# Altium PCB GSv1_PCB.PcbDoc
Units mm, origin at the board's own origin, x right, y up, seen from the top; angles counter-clockwise.
Board outline 82.45 x 81 mm, 2 copper layers (Top Layer, Bottom Layer); 10 components, 12 nets, 88 pads, 26 vias.
Unrouted connection lines stored in the file: 3.
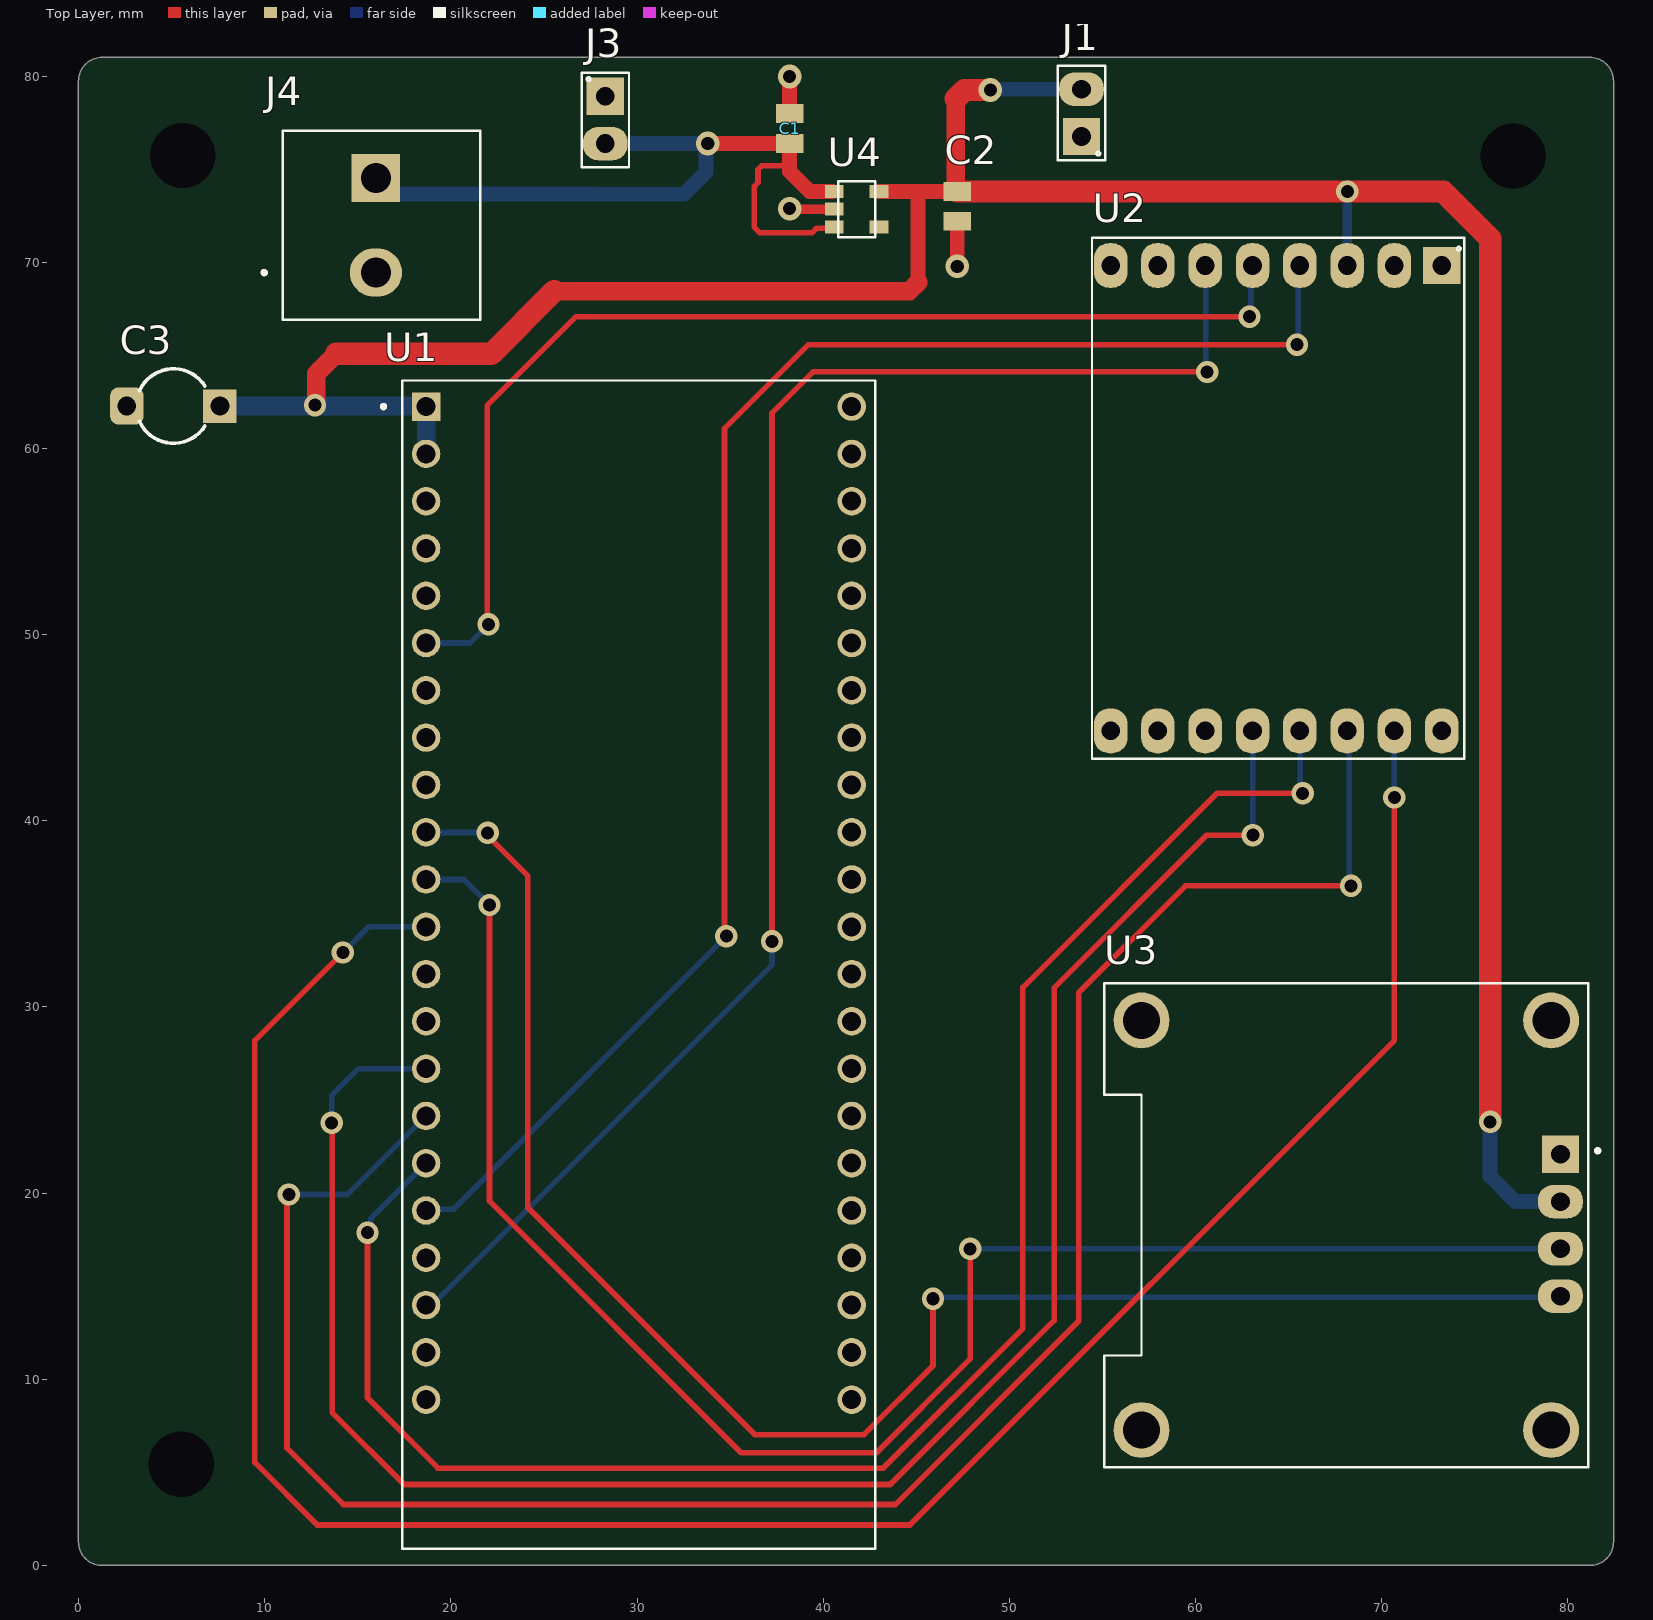
[diagram p0: Top Layer view]
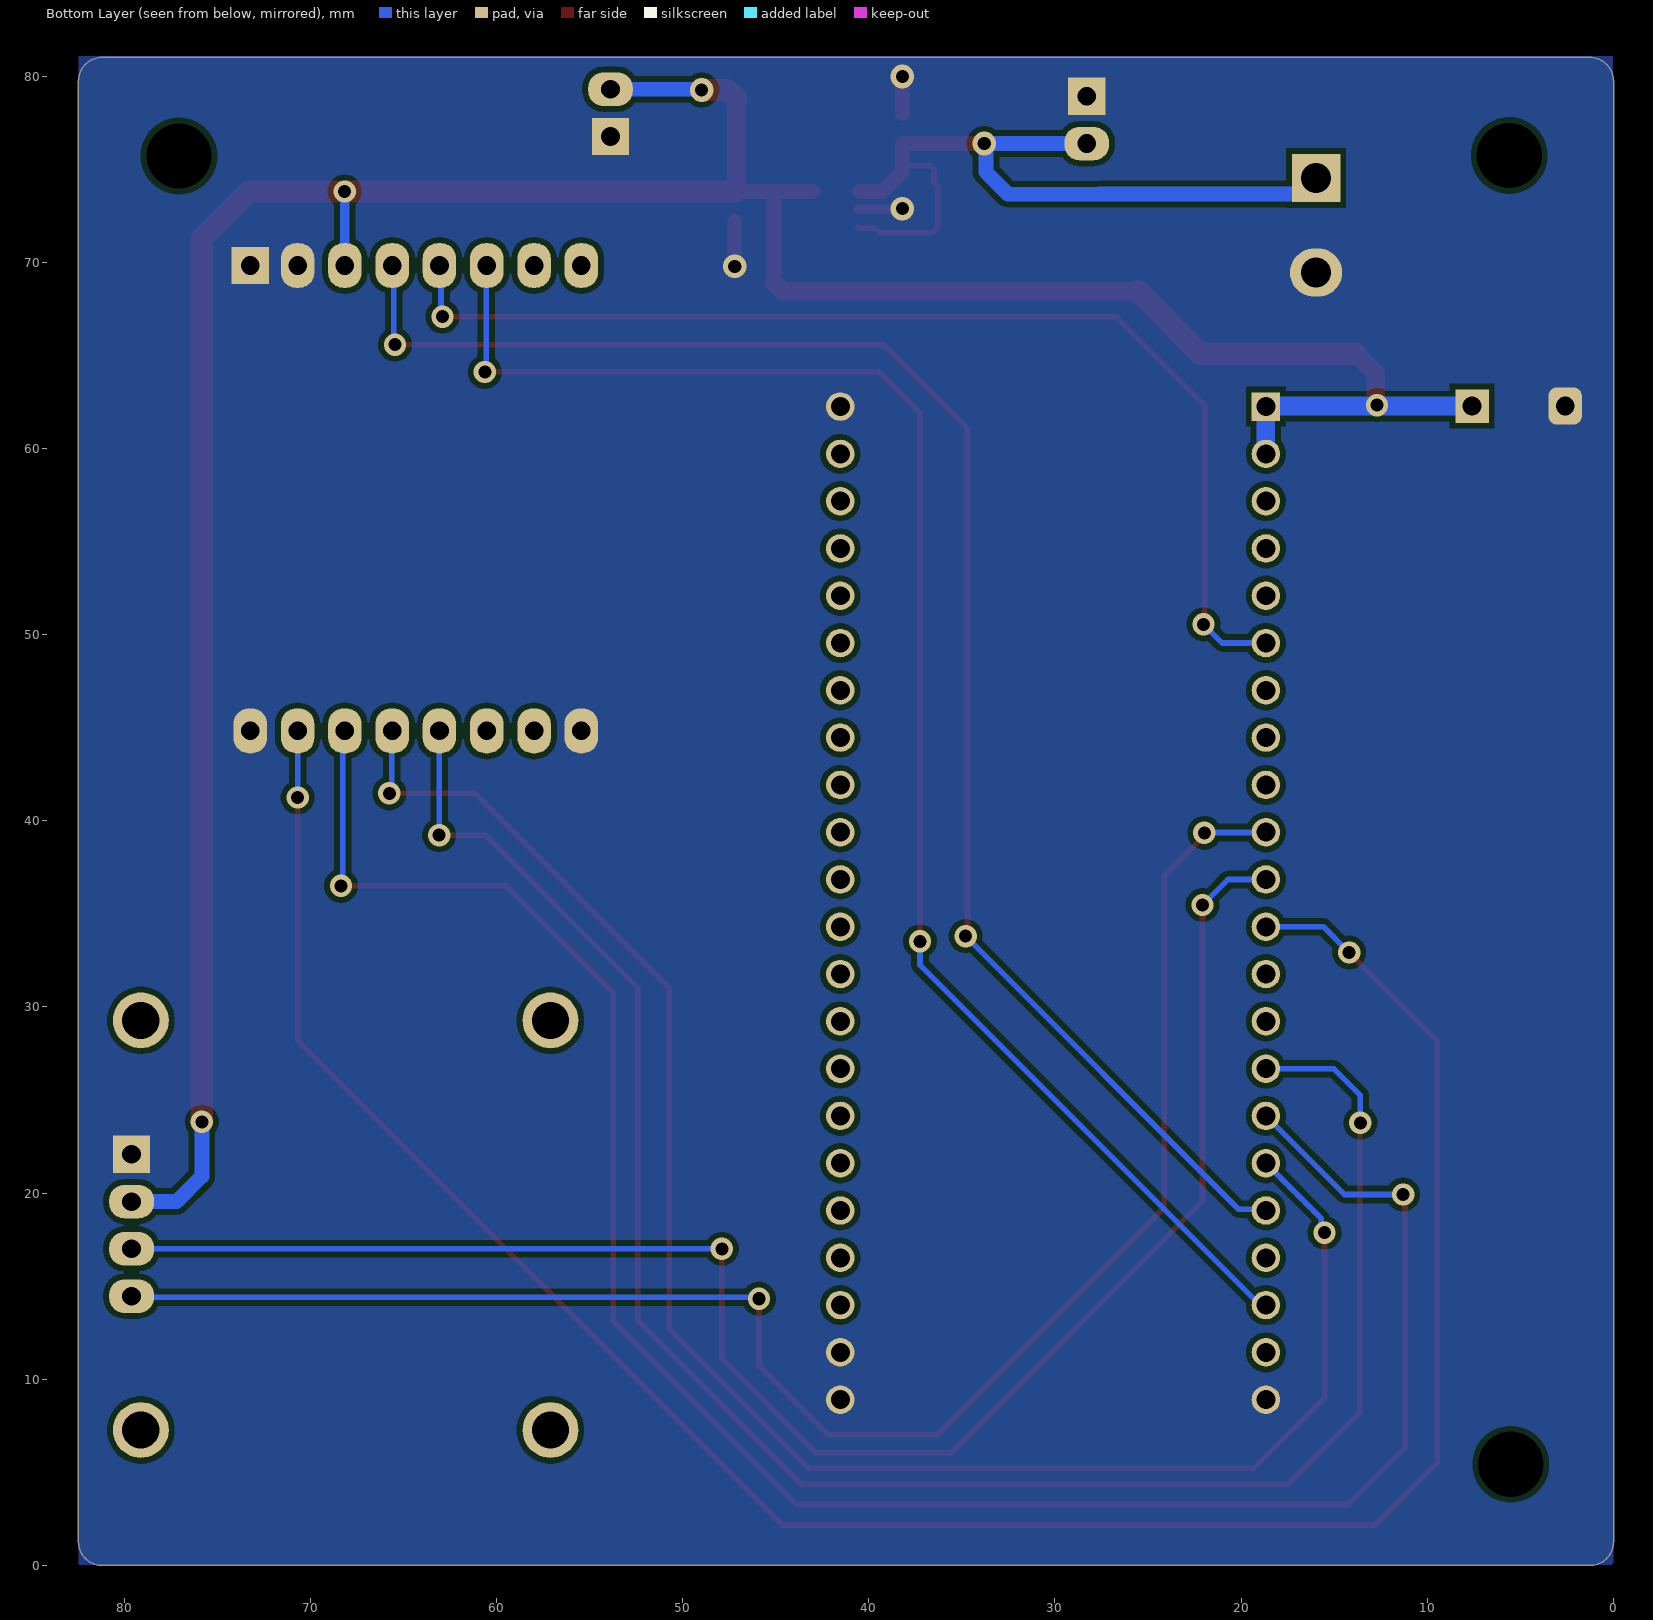
[diagram p1: Bottom Layer view, seen from below]
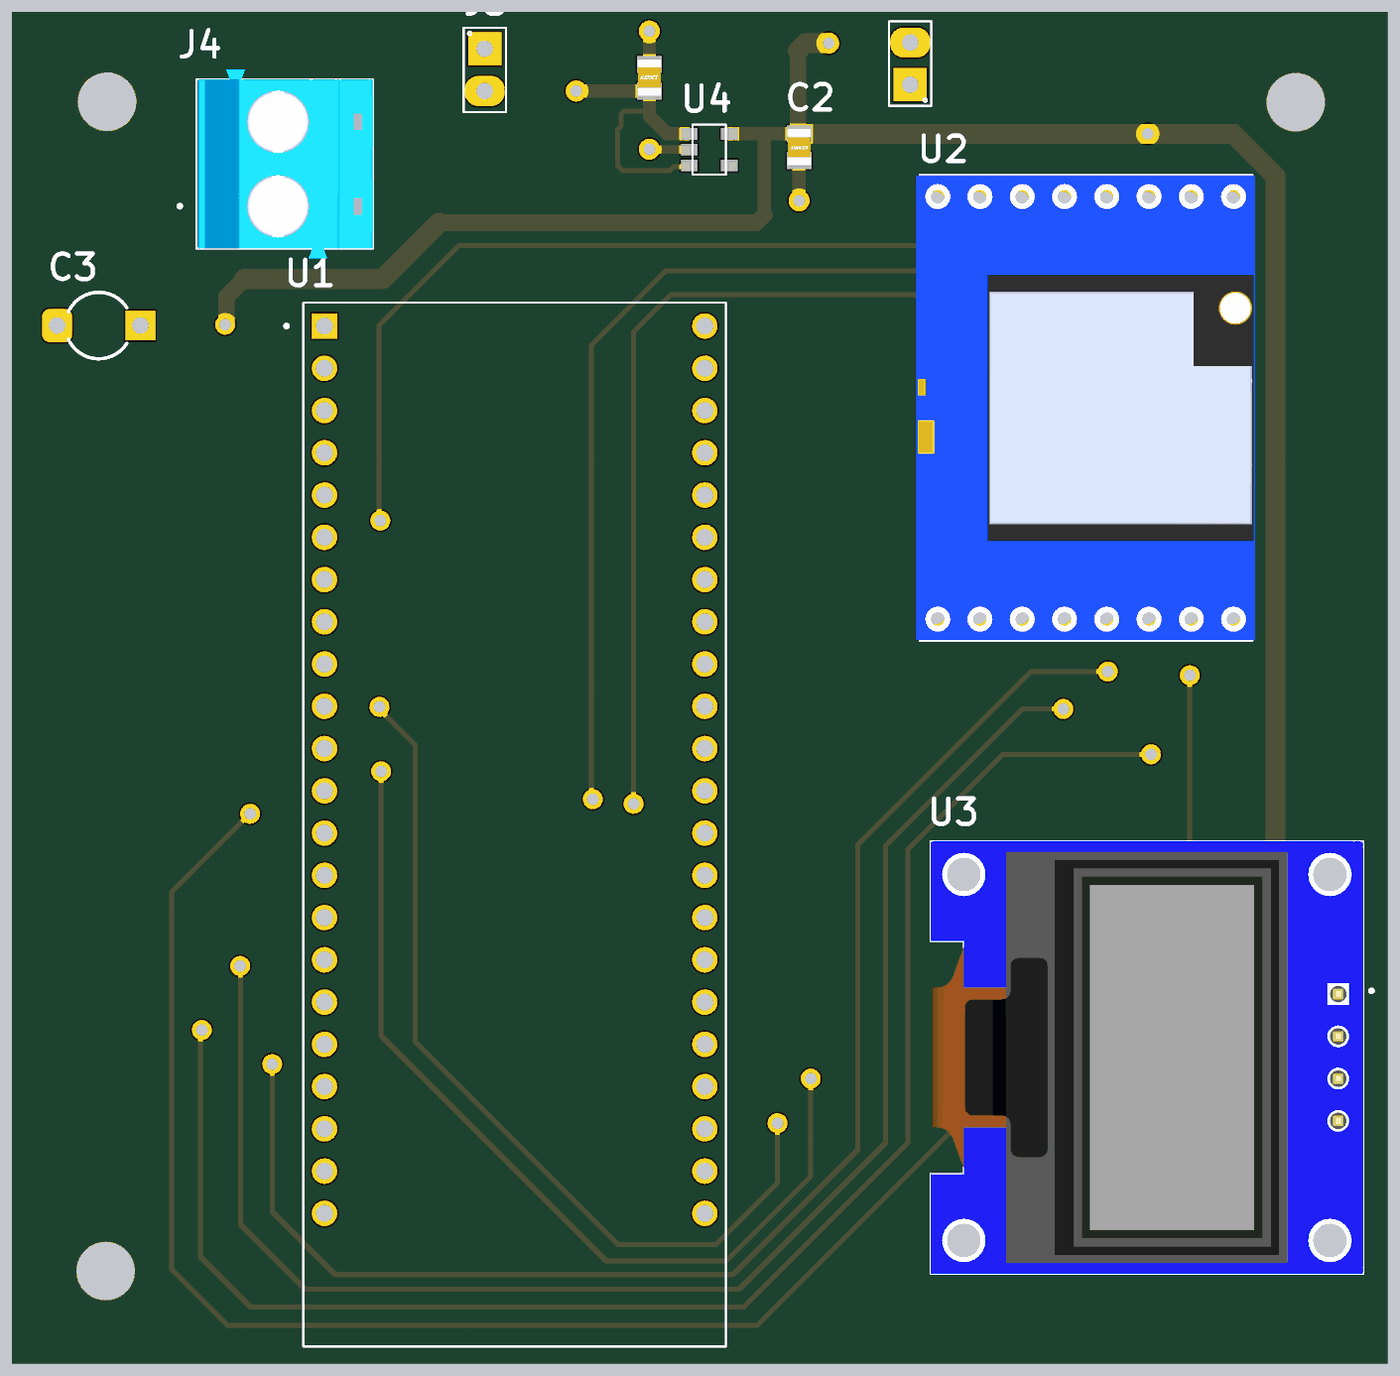
[diagram p2: 3D render of the assembled board from above, using the file's embedded part models]

## Layer stack, top to bottom
Top Solder: solder mask 0.0102, Solder Resist, Dk 3.5
Top Layer: signal copper 0.0356
Dielectric 1: dielectric 0.32, FR-4, Dk 4.8
Bottom Layer: signal copper 0.0356
Bottom Solder: solder mask 0.0102, Solder Resist, Dk 3.5

## Board outline
0,1.27 0,79.73 cw(c1.27,79.73) 1.27,81 81.18,81 cw(c81.18,79.73) 82.45,79.73 82.45,1.27 cw(c81.18,1.27) 81.18,0 1.27,0 cw(c1.27,1.27)

## Design rules (kind name [scope] priority, off if disabled: settings)
Clearance [All] p1: gap=0.3 ignorepadtopadclearanceinfootprint=FALSE
HoleSize [All] p1: absolutevalues=TRUE maxlimit=3.5 minlimit=0.3 maxpercent=80.000 minpercent=20.000
PolygonConnect [All] p1: connectstyle=Direct reliefconductorwidth=0.254 reliefentries=4 polygonreliefangle="90 Angle" airgapwidth=0.254
RoutingVias [All] p1: holewidth=0.711 width=1.27 viastyle="Through Hole" minholewidth=0.711 minwidth=1.27 maxholewidth=0.711 maxwidth=1.27
SolderMaskExpansion [All] p1: expansion=0.102 istentingtop=FALSE
Width [All] p1: maxlimit=1.5 minlimit=0.254 preferedwidth=0.3
29 further rules are at their usual default settings.

## Components (designator, comment, footprint, x,y, rotation, side; value= is the part's Value field where it differs from the comment)
C1 "1uF" 0805 38.2,77.175 r270 top
C2 "2.2uF" 0805 47.2,73 r90 top
C3 "DIP - Electrolytic Capacitor" DIP_Electrolytic_Capacitor 5.1,62.275 r180 top value=100nF
J1 "J - Header 2.54mm 2Pos 1Row" "Header 2.54mm 2Pos 1Row" 53.875,76.75 r90 top
J3 "J - Header 2.54mm 2Pos 1Row" "Header 2.54mm 2Pos 1Row" 28.3,78.915 r270 top
J4 "J - Connector 5.08mm 2Pos" "CONNECTOR 508mm 2POS" 15.975,69.445 r90 top
U1 "ESP32-S3-DEVKITC-1-N8R2" ORIGINAL_ESP32-S3-DEVKITC_1 30.1,32.275 r0 top
U2 "Module - LoRa Ra-02 Ai-Thinker" "MODULE LoRa Ra-02 Ai Thinker_separate rows" 73.22,69.825 r180 top
U3 "Module - OLED Display 096" MODULE_DM-OLED096-636 68.1,18.275 r270 top
U4 "LDO - XC6222B281MR-G" SOT25 41.9,72.8 r270 top

## Footprints (in the part's own frame and the unit in brackets; to place one, negate y for a bottom-side part, rotate by r counter-clockwise, add the part's x,y. Pads: shape width x height; smd on the part's side, far side on the other; paste and mask are expansions set on the pad)
0805 [mm] "0805 case (inch)"
  rect 1.02x1.47 smd: 1(-0.8,0) 2(0.8,0)
  body extent -1.1,-0.73 1.1,0.72, height 0.88
"CONNECTOR 508mm 2POS" [mm]
  oval 2.6x2.8 hole 1.6: 1(0,0)
  rect 2.6x2.6 hole 1.6: 2(5.08,0)
  silkscreen extent -2.54,-5.6 7.62,6.1, body extent -3.14,-5.6 8.22,4.9, height 19.5
DIP_Electrolytic_Capacitor [mm] "DIP Electrolytic Capacitor; 2 Leads; Pin spacing 5mm"
  rect 1.8x1.8 hole 1: 1(-2.5,0)
  rrect50% 1.8x2 hole 1: 2(2.5,0)
  silkscreen extent -1.69,-2 1.82,2
"Header 2.54mm 2Pos 1Row" [mm]
  rect 2x2 hole 1: 1(0,0)
  rrect90% 1.8x2.4 hole 1: 2(2.54,0)
  silkscreen extent -1.27,-1.27 3.81,1.27
"MODULE LoRa Ra-02 Ai Thinker_separate rows" [mm]
  rect 2x2 hole 1: 1(0,0)
  rrect90% 1.8x2.4 hole 1: 2(2.54,0) 3(5.08,0) 4(7.62,0) 5(10.16,0) 6(12.7,0) 7(15.24,0) 8(17.78,0) 9(0,25) 10(2.54,25) 11(5.08,25) 12(7.62,25) 13(10.16,25) 14(12.7,25) 15(15.24,25) 16(17.78,25)
  silkscreen extent -1.22,-1.5 18.78,26.5, body extent -1.4,-1.45 19,26.45, height 4.7
MODULE_DM-OLED096-636 [mm]
  rect 2x2 hole 1: 1(-3.81,11.5)
  rrect90% 1.8x2.4 hole 1: 2(-1.27,11.5) 3(1.27,11.5) 4(3.81,11.5)
  round 3 hole 2: S1(-11,11) S2(11,11) S3(11,-11) S4(-11,-11)
  silkscreen extent -13,-13 13,13.6, body extent -13,-13 13,13, height 5.66
ORIGINAL_ESP32-S3-DEVKITC_1 [mm]
  rect 1.53x1.53 hole 1.02: J1_1(-11.43,29.97)
  round 1.53 hole 1.02: J1_2(-11.43,27.43) J1_3(-11.43,24.89) J1_4(-11.43,22.35) J1_5(-11.43,19.81) J1_6(-11.43,17.27) J1_7(-11.43,14.73) J1_8(-11.43,12.19) J1_9(-11.43,9.65) J1_10(-11.43,7.11) J1_11(-11.43,4.57) J1_12(-11.43,2.03) J1_13(-11.43,-0.51) J1_14(-11.43,-3.05) J1_15(-11.43,-5.59) J1_16(-11.43,-8.13) J1_17(-11.43,-10.67) J1_18(-11.43,-13.21) J1_19(-11.43,-15.75) J1_20(-11.43,-18.29) J1_21(-11.43,-20.83) J1_22(-11.43,-23.37) J3_1(11.43,29.97) J3_2(11.43,27.43) J3_3(11.43,24.89) J3_4(11.43,22.35) J3_5(11.43,19.81) J3_6(11.43,17.27) J3_7(11.43,14.73) J3_8(11.43,12.19) J3_9(11.43,9.65) J3_10(11.43,7.11) J3_11(11.43,4.57) J3_12(11.43,2.03) J3_13(11.43,-0.51) J3_14(11.43,-3.05) J3_15(11.43,-5.59) J3_16(11.43,-8.13) J3_17(11.43,-10.67) J3_18(11.43,-13.21) J3_19(11.43,-15.75) J3_20(11.43,-18.29) J3_21(11.43,-20.83) J3_22(11.43,-23.37)
  silkscreen extent -13.82,-31.37 12.7,31.37
SOT25 [mm]
  rect 0.7x1 smd: P$1(-1,-1.3) P$2(-0.05,-1.3) P$3(0.9,-1.3) P$4(-1,1.1) P$5(0.9,1.1)
  silkscreen extent -1.55,-1.1 1.45,0.9

## Part data
C1 C2: library part "CAP - SMD_0805(inch)", "SMD Ceramic Capacitor"
C3: "Capacitor", PackageDescription="Capacitor; 2 Leads", PackageReference=CAPR5-4X5, Published=23-Sep-2002, Publisher="Altium Limited"
U1: "WiFi Development Tools - 802.11 (Engineering Samples Only) ESP32-S3 General-Purpose Development Board, ESP32-S3-WROOM-1-N8R2, with Pin Header", Package=None, Availability="In Stock", Check_prices=https://www.snapeda.com/parts/ESP32-S3-DEVKITC-1-N8R2/Espressif+Systems/view-part/?ref=eda, MF="Espressif Systems", MP=ESP32-S3-DEVKITC-1-N8R2, Price=None, Purchase-URL=https://pricing.snapeda.com/search/part/ESP32-S3-DEVKITC-1-N8R2/?ref=eda, SnapEDA_Link=https://www.snapeda.com/parts/ESP32-S3-DEVKITC-1-N8R2/Espressif+Systems/view-part/?ref=snap
U2: "LoRa 433 MHz Module"
U3: "0.96â€ 128 X 64 MONOCHROME GRAPHIC OLED DISPLAY MODULE - I2C"
U4: "Linear Voltage Regulator IC 1 Output 700mA SOT-25", Package="SOT-753 Torex", Availability=Warning, Check_prices=https://www.snapeda.com/parts/XC6222B281MR-G/Torex/view-part/1149890/?ref=eda, MF=Torex, MP=XC6222B281MR-G, Price=None, Purchase-URL=https://pricing.snapeda.com/search/part/XC6222B281MR-G/?ref=eda, SnapEDA_Link=https://www.snapeda.com/parts/XC6222B281MR-G/Torex/view-part/1149890/?ref=snap
J1 J3: LatestRevisionDate=17-Jul-2002, LatestRevisionNote="Re-released for DXP Platform.", Publisher="Altium Limited"

## Free pads (board coordinates)
  round 0 hole 3.5: 2(5.6,75.725) 4(77.05,75.7) 5(5.516,5.434)

## Via types
v1: diameter 1.2, hole 0.7, Top Layer to Bottom Layer, 21 vias
v2: diameter 1.27, hole 0.7, Top Layer to Bottom Layer, 5 vias

## Nets (pads, with @x,y where several pads share a name; then routed paths per layer and width w, separated by ;. In a path a pad name is that pad's centre, name@x,y a point inside that pad or via, vN(x,y) a via of type N, cw(c..) or ccw(c..) an arc to the next point about the centre after c; other vN are vias at no path point)
+3V3: C2.2 C3.1 J1.2 U1.J1_1 U1.J1_2 U2.3 U3.2 U4.P$4 | length 159.2
  Top Layer w0.8: v1(12.7,62.325) v1@12.777,62.402 ; U4.P$4 45.1,73.8 ; 45.1,68.919 45.1,73.8 ; C2.2@47.125,73.875 C2.2 45.1,73.8
  Top Layer w1: v1@12.777,62.402 12.777,64.002 13.85,65.075 ; 25.55,68.45 44.631,68.45 45.1,68.919 ; C2.2@47.125,73.875 47.125,78.781
  Top Layer w1.2: 13.85,65.075 22.175,65.075 25.55,68.45 ; 47.125,78.781 47.594,79.25 v2(48.975,79.25) ; C2.2 v1(68.15,73.8) 73.3,73.8 75.825,71.275 v1(75.825,23.825)
  Bottom Layer w0.5: U2.3 68.145,69.83 68.145,73.795 v1(68.15,73.8)
  Bottom Layer w0.8: v2@48.875,79.25 48.915,79.29 J1.2 ; v1(75.825,23.825) 75.825,20.9 77.18,19.545 U3.2
  Bottom Layer w1: C3.1 18.64,62.275 U1.J1_1 U1.J1_2
+BAT: C1.2 J3.2 J4.2 U4.P$1 U4.P$3 | length 44
  Top Layer w0.3: 38.2,74.875 37.9,75.175 36.7,75.175 36.5,74.975 36.5,74.275 36.3,74.075 36.3,71.875 36.6,71.575 39.4,71.575 39.65,71.825 40.525,71.825 U4.P$3
  Top Layer w0.8: v2(33.8,76.375) C1.2 38.2,75.175 38.2,74.875 39.275,73.8 U4.P$1@40.5,73.8
  Bottom Layer w0.8: J4.2 16.84,73.66 27.6,73.66 27.61,73.65 32.525,73.65 33.71,74.835 33.71,76.285 v2(33.8,76.375) J3.2
GND: C1.1 C2.1 C3.2 J1.1 J3.1 J4.1 U1.J1_22 U1.J3_1 U1.J3_21 U1.J3_22 U2.1 U2.2 U2.9 U2.16 U3.1 U4.P$2 | length 6.8
  Top Layer w0.5: v2(38.2,72.875) 38.225,72.85 U4.P$2
  Top Layer w0.8: C1.1 v2(38.2,79.975) ; v2(47.2,69.775) C2.1
NetU1_J1_6: U1.J1_6 U2.5 | length 61.3
  Top Layer w0.3: v1@21.95,50.525 21.95,62.3 26.725,67.075 v1(62.9,67.075)
  Bottom Layer w0.3: U1.J1_6 21.02,49.545 v1(22.025,50.55) ; v1(62.9,67.075) 62.98,67.155 62.98,69.745 U2.5
NetU1_J1_10: U1.J1_10 U3.4 | length 90.3
  Top Layer w0.3: v1@21.706,39.469 24.138,37.037 24.138,19.212 36.325,7.025 42.2,7.025 45.9,10.725 v1(45.9,14.325)
  Bottom Layer w0.3: U1.J1_10 18.687,39.368 21.957,39.368 v1(21.975,39.35) ; v1(45.9,14.325) 45.97,14.395 79.53,14.395 U3.4
NetU1_J1_11: U1.J1_11 U3.3 | length 91
  Top Layer w0.3: v1(22.075,35.475) 22.075,19.575 35.6,6.05 42.85,6.05 47.895,11.095 v1(47.895,17.005)
  Bottom Layer w0.3: U1.J1_11 20.705,36.845 v1(22.075,35.475) ; v1(47.895,17.005) U3.3
NetU1_J1_12: U1.J1_12 U2.10 | length 124.4
  Top Layer w0.3: v1(14.2,32.925) 9.475,28.2 9.475,5.525 12.825,2.175 44.65,2.175 70.68,28.205 v1(70.68,41.25)
  Bottom Layer w0.3: v1(14.2,32.925) 15.58,34.305 U1.J1_12 ; v1(70.68,41.25) U2.10
NetU1_J1_15: U1.J1_15 U2.13 | length 104.3
  Top Layer w0.3: v1(13.6,23.775) 13.625,23.75 13.625,8.225 17.5,4.35 43.6,4.35 52.4,13.15 52.4,31.025 60.6,39.225 v1(63.075,39.225)
  Bottom Layer w0.3: v1(13.6,23.775) 13.6,25.25 15.035,26.685 U1.J1_15 ; U2.13 63.067,44.817 63.067,39.232 v1(63.075,39.225)
NetU1_J1_16: U1.J1_16 U2.11 | length 113.7
  Top Layer w0.3: v1(11.3,19.925) 11.2,19.825 11.2,6.3 14.225,3.275 43.875,3.275 53.725,13.125 53.725,30.775 59.45,36.5 v1(68.35,36.5)
  Bottom Layer w0.3: v1(11.3,19.925) 14.45,19.925 U1.J1_16 ; U2.11 68.245,44.72 68.245,36.605 v1(68.35,36.5)
NetU1_J1_17: U1.J1_17 U2.12 | length 94.9
  Top Layer w0.3: v1(15.525,17.875) 15.525,9.006 19.306,5.225 43.225,5.225 50.725,12.725 50.725,31.05 61.15,41.475 v1(65.75,41.475)
  Bottom Layer w0.3: v1(15.525,17.875) 15.697,18.047 15.697,18.632 U1.J1_17 ; U2.12 65.625,44.8 65.625,41.6 v1(65.75,41.475)
NetU1_J1_18: U1.J1_18 U2.4 | length 86.5
  Top Layer w0.3: v1(34.8,33.8) 34.7,33.9 34.7,61.075 39.2,65.575 v1(65.45,65.575)
  Bottom Layer w0.3: U1.J1_18 18.734,19.129 20.129,19.129 v1(34.8,33.8) ; v1(65.45,65.575) 65.525,65.65 65.525,69.75 U2.4
NetU1_J1_20: U1.J1_20 U2.6 | length 86.2
  Top Layer w0.3: v1(37.25,33.525) 37.25,61.9 39.475,64.125 60.6,64.125 v1(60.625,64.1) ; U2.6@60.52,69.525 U2.6
  Bottom Layer w0.3: U1.J1_20 18.985,13.985 37.25,32.25 v1(37.25,33.525) ; U2.6 60.547,69.797 60.547,64.177 v1(60.625,64.1)
pads on no net: U1.J1_3 U1.J1_4 U1.J1_5 U1.J1_7 U1.J1_8 U1.J1_9 U1.J1_13 U1.J1_14 U1.J1_19 U1.J1_21 U1.J3_2 U1.J3_3 U1.J3_4 U1.J3_5 U1.J3_6 U1.J3_7 U1.J3_8 U1.J3_9 U1.J3_10 U1.J3_11 U1.J3_12 U1.J3_13 U1.J3_14 U1.J3_15 U1.J3_16 U1.J3_17 U1.J3_18 U1.J3_19 U1.J3_20 U2.7 U2.8 U2.14 U2.15 U3.S1 U3.S2 U3.S3 U3.S4 U4.P$5

## Polygon pours and split planes (outlines as drawn)
GND on Bottom Layer "GND_L02_P000" (solid, pour order 0): 0.05,81.075 0.075,81.05 82.425,81.05 82.425,0.025 82.4,0.05 0.025,0.05

## Silkscreen, mask and mechanical layers (free items; w line width, h text height)
BoardOutline:
  lines w0.254: 0,1.27 ccw(c1.27,1.27) 1.27,0 51.847,0 81.18,0 ccw(c81.18,1.27) 82.45,1.27 82.45,79.73 ccw(c81.18,79.73) 81.18,81 1.27,81 ccw(c1.27,79.73) 0,79.73 0,1.27